# Altium PCB PCB Layout.PcbDoc
Units mm, origin at the board's own origin, x right, y up, seen from the top; angles counter-clockwise.
Board outline 49.28 x 47.88 mm, 2 copper layers (Top Layer, Bottom Layer); 42 components, 39 nets, 175 pads, 37 vias.
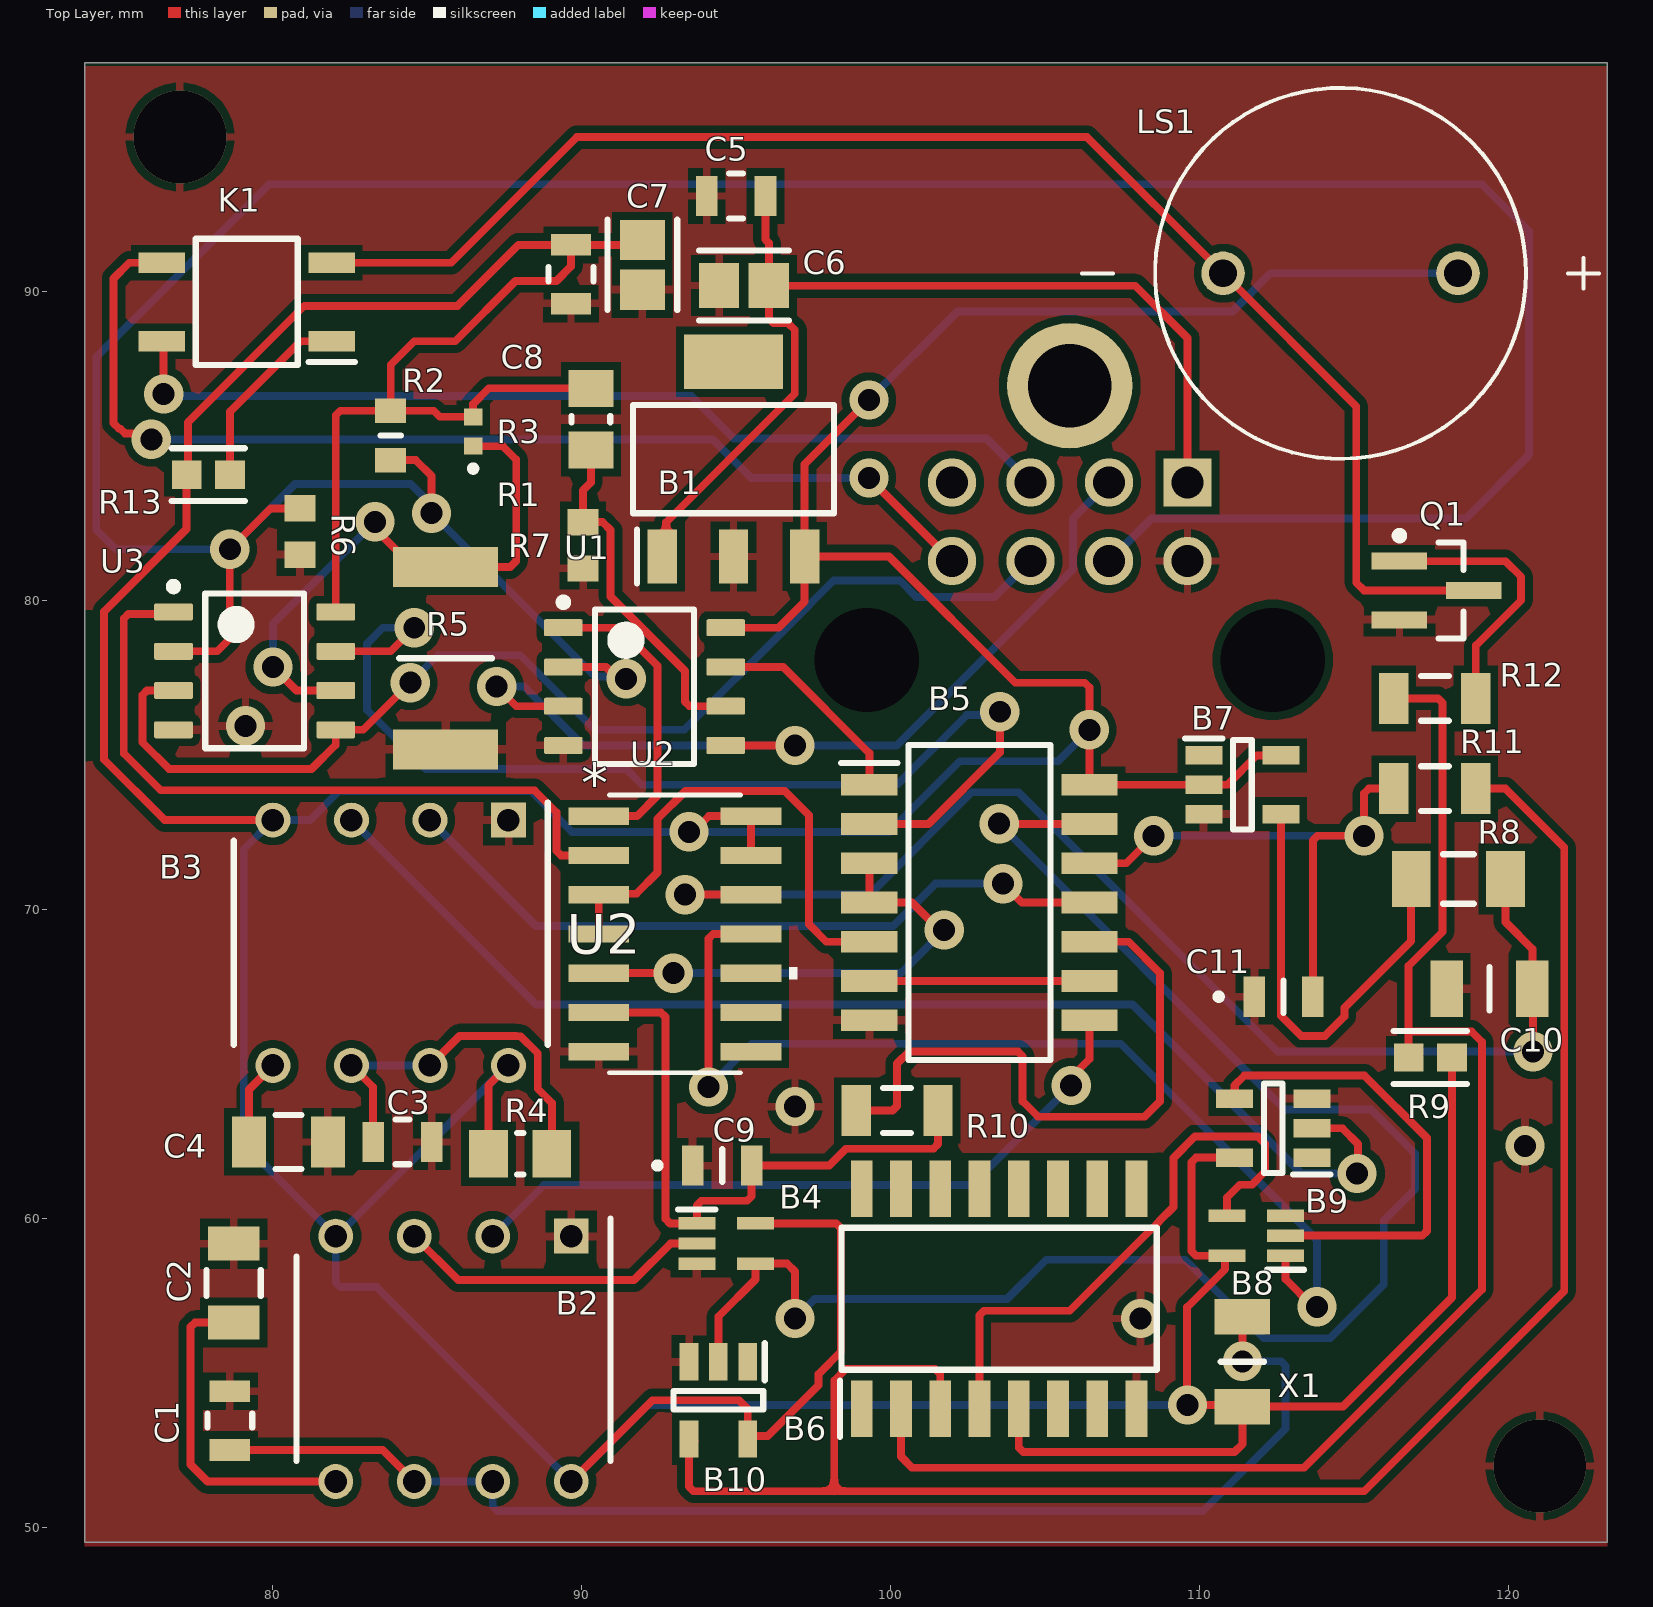
[diagram p0: Top Layer view]
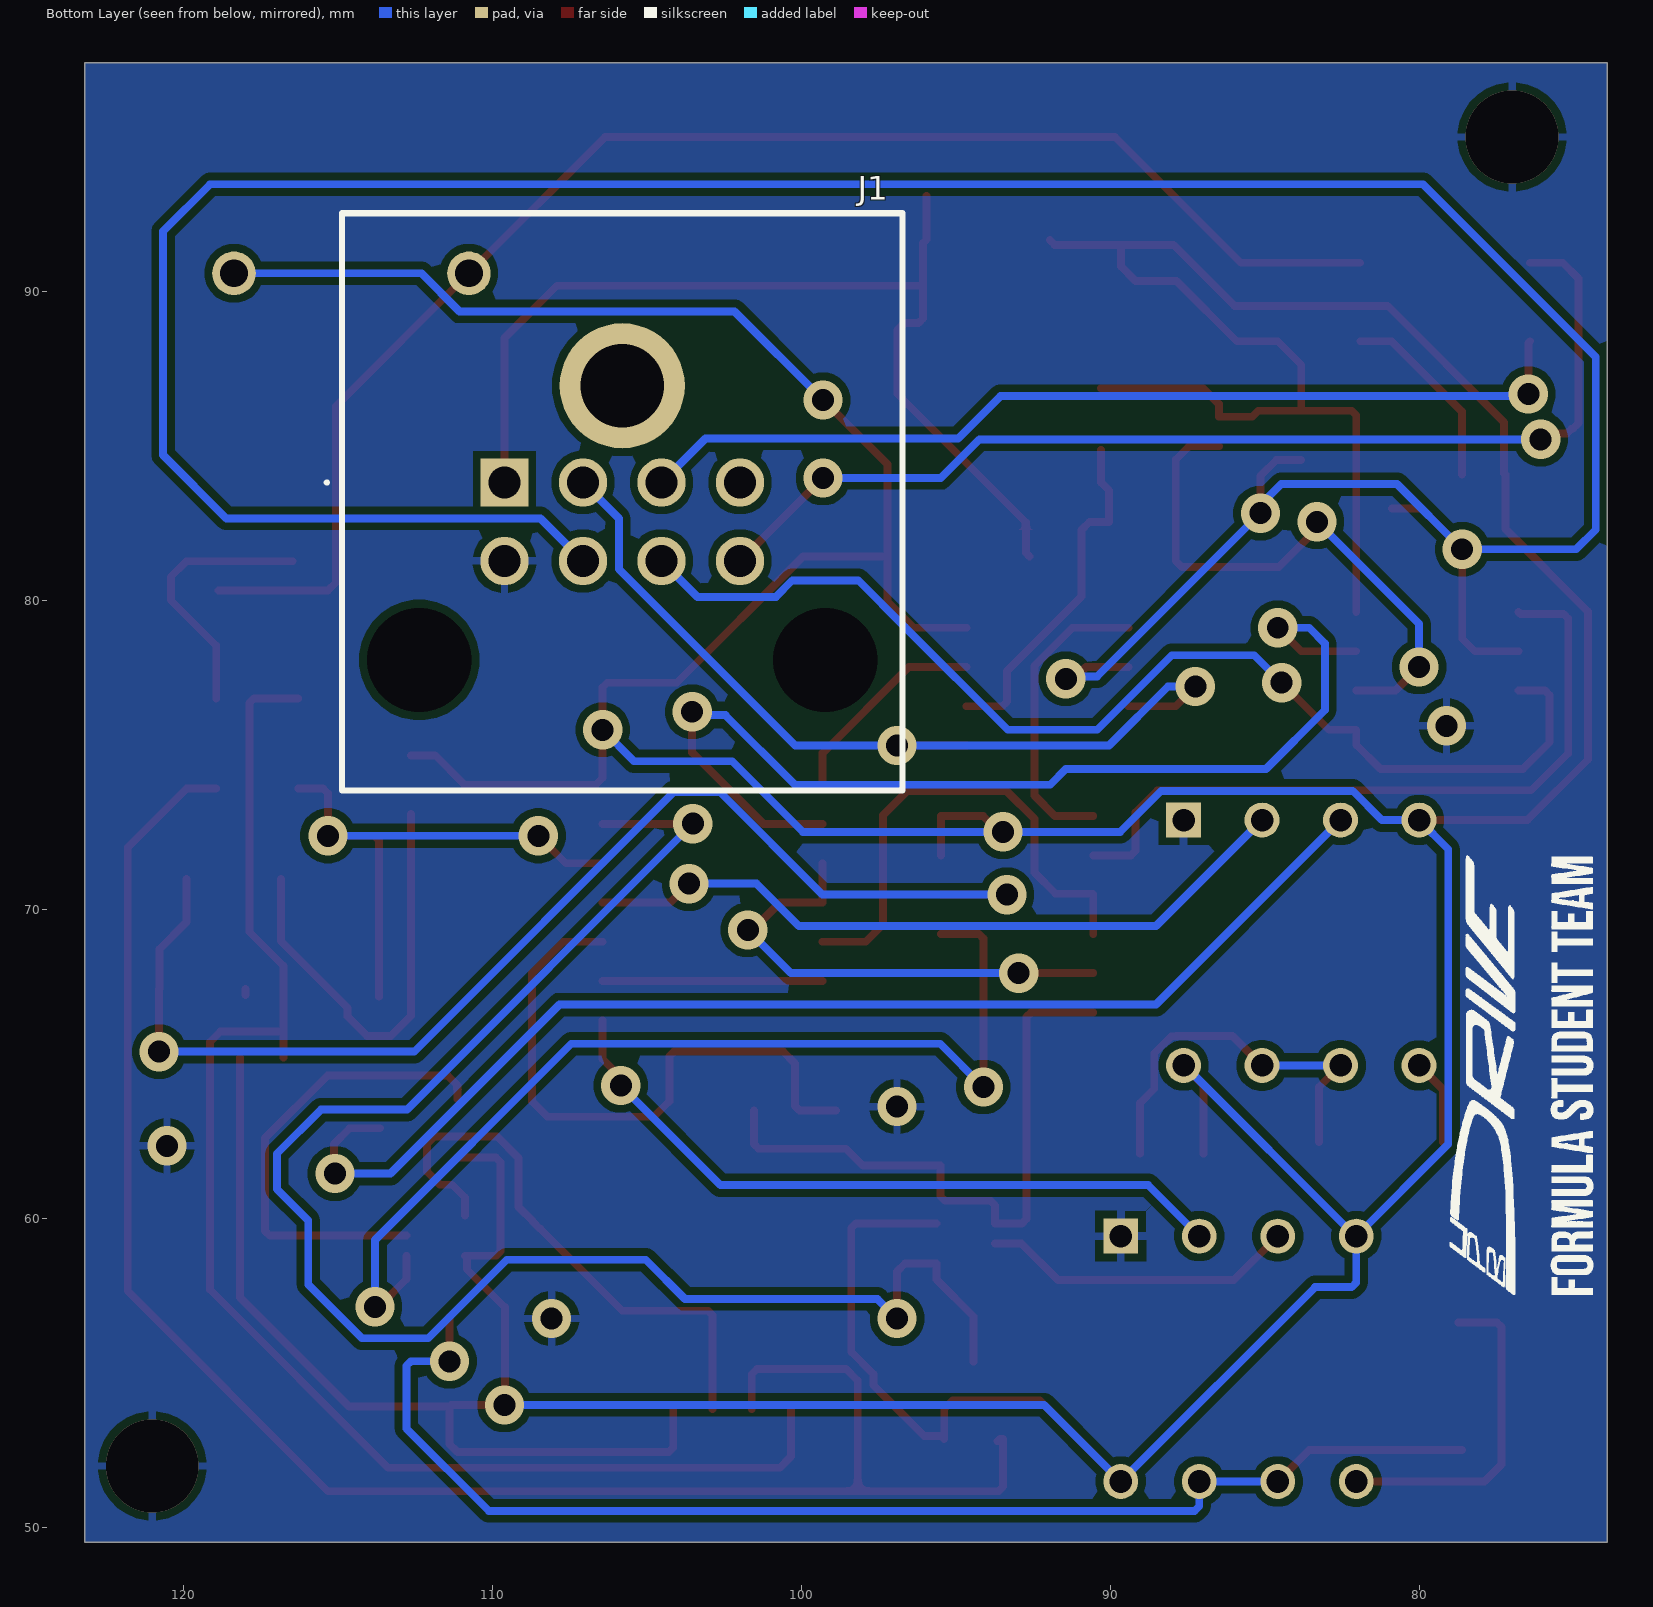
[diagram p1: Bottom Layer view, seen from below]

## Layer stack, top to bottom
Top Solder: solder mask 0.0102, Solder Resist, Dk 3.8
Top Layer: signal copper 0.0356
Dielectric 2: core 0.32, NP-155F, Dk 4.43
Bottom Layer: signal copper 0.0356
Bottom Solder: solder mask 0.0102, Solder Resist, Dk 3.8

## Board outline
73.914,49.53 73.914,97.409 123.19,97.409 123.19,49.53

## Design rules (kind name [scope] priority, off if disabled: settings)
Clearance [All] p1: gap=0.254 ignorepadtopadclearanceinfootprint=TRUE
PolygonConnect [All] p1: connectstyle=Relief reliefconductorwidth=0.254 reliefentries=4 polygonreliefangle="90 Angle" airgapwidth=0.254
RoutingVias [All] p1: holewidth=0.711 width=1.27 viastyle="Through Hole" minholewidth=0.711 minwidth=1.27 maxholewidth=0.711 maxwidth=1.27
SolderMaskExpansion [All] p1: expansion=0.102 istentingtop=FALSE
SupplyNets "Schematic Supply Nets" [InNet('GND')] p1: voltage=0.000
Width [All] p1: maxlimit=0.254 minlimit=0.254 preferedwidth=0.254
30 further rules are at their usual default settings.

## Components (designator, comment, footprint, x,y, rotation, side; value= is the part's Value field where it differs from the comment)
B1 "UA78M05QDCYRQ1" SOT230P700X180-4N 94.912,84.577 r90 top
B2 "NE555P" DIP794W53P254L959H508Q8N 85.852,55.466 r270 top
B3 "NE555P" DIP794W53P254L959H508Q8N 83.82,68.928 r270 top
B4 "500ms Timeout" SOT65P210X110-5N 94.676,59.197 r0 top
B5 "NAND Logic" SOIC127P780X200-14N 102.87,70.231 r0 top
B6 "CD4043BNSR" SOIC127P780X200-16N 103.505,57.41 r90 top
B7 "CAHCT1G14QDBVRQ1" SOT95P280X145-5N 111.379,74.041 r0 top
B8 "SN74LVC1G32DCKRE4" SOT65P210X110-5N 111.826,59.451 r180 top
B9 "CAHCT1G14QDBVRQ1" SOT95P280X145-5N 112.375,62.926 r180 top
B10 "CAHCT1G14QDBVRQ1" SOT95P280X145-5N 94.422,54.122 r270 top
C1 "GRM21BR61H106ME43K" FP-GRM21B-0_2-e0_2_0_7-MFG 78.613,53.467 r90 top value=10µF
C2 "CL31B104KBCNNNL" FP-CL31-IPC_C 78.74,57.918 r90 top value=100nF
C3 "GRM21BR61H106ME43K" FP-GRM21B-0_2-e0_2_0_7-MFG 84.201,62.484 r0 top value=10µF
C4 "CL31B104KBCNNNL" FP-CL31-IPC_C 80.512,62.484 r0 top value=100nF
C5 "GRM21BR61H106ME43K" FP-GRM21B-0_2-e0_2_0_7-MFG 94.996,93.091 r0 top value=10µF
C6 "08051C104K4Z2A" FP-0805-L_2_01_0_2-W_1_25-IPC_B 95.251,90.194 r0 top value=100nF
C7 "08051C104K4Z2A" FP-0805-L_2_01_0_2-W_1_25-IPC_B 91.961,90.863 r90 top value=100nF
C8 "GRM21BR61H106ME43K" FP-GRM21B-0_2-e0_2_0_7-MFG 89.654,90.56 r90 top value=10µF
C9 "GRM21BC81D106KE51K" GRM21BR60J226ME39L 94.549,61.722 r0 top value=10uF
C10 "CL31A107MQHNNWE" CAPC3216X180N 119.373,67.437 r0 top
C11 "GRM21BC81D106KE51K" GRM21BR60J226ME39L 112.71,67.183 r0 top value=10uF
J1 "30700-4081" 307004081 109.601,83.82 r180 bottom
K1 "CPC1017N" SOP254P610X206-4N 79.165,89.662 r180 top
LS1 "KXG1203C" XDCR_KXG1203C 114.554,90.589 r180 top
Q1 "BSR315P" INF-PG-SC59_M 117.659,80.325 r0 top
R1 "34K" MCS04020C1003FE000 86.487,85.471 r90 top
R2 "68k" RESC1608X55N#1 83.82,85.344 r90 top
R3 "RC0805FR-13200KL" RESC2013X60X35ML10T20 90.297,85.868 r90 top value=200kΩ
R4 "RK73H2ATTD1003F" RESC2013X60X30ML20T20 88.011,62.103 r0 top value=100kΩ
R5 "10k" RESC6332X70N 85.598,78.134 r90 top
R6 "4.3k" RESC1608X50N 80.883,82.235 r90 top
R7 "37k" RESC1608X55N#2 90.043,81.788 r90 top
R8 "RC1206FR-07100RL" RESC3116X65X40ML10T20 118.364,70.993 r0 top value=100R
R9 "RN73C1J10KB" FP-RN731J-IPC_B 117.458,65.215 r0 top value=10kΩ
R10 "CRCW12061K00FKEA" RESC3216X60X45LL15T20 100.203,63.5 r0 top value=1kR
R11 "CRCW12061K00FKEA" RESC3216X60X45LL15T20 117.602,73.914 r0 top value=1kR
R12 "CRCW12064K70FKEA" RESC3216X60X45LL15T20 117.602,76.835 r0 top value=4.7kR
R13 "RN73C1J10KB" FP-RN731J-IPC_B 77.918,84.074 r0 top value=10kΩ
U1 "LM392MX" D0008A_L 92.033,77.216 r0 top
U2 "AND Logic" D14 93.015,69.215 r0 top
U3 "LM392MX" D0008A_L 79.417,77.724 r0 top
X1 "45.3k" RESC3216X65N 111.379,55.372 r90 top

## Footprints (in the part's own frame and the unit in brackets; to place one, negate y for a bottom-side part, rotate by r counter-clockwise, add the part's x,y. Pads: shape width x height; smd on the part's side, far side on the other; paste and mask are expansions set on the pad)
307004081 [mm]
  rect 1.56x1.56 hole 1.04: 1(0,0)
  round 1.56 hole 1.04: 2(2.54,0) 3(5.08,0) 4(7.62,0) 5(0,-2.54) 6(2.54,-2.54) 7(5.08,-2.54) 8(7.62,-2.54)
  round 4.05 hole 2.7: MH1(3.81,3.13)
  round 1.685 hole 3.37 unplated: MH2(-2.76,-5.74) MH3(10.38,-5.74)
  silkscreen extent -5.8,-9.97 12.88,8.71
CAPC3216X180N [mm]
  rect 1.05x1.82 smd: 1(-1.39,0) 2(1.39,0)
  silkscreen extent 0,-0.7 0,0.7
D0008A_L [mm] "SOIC, 8-Leads, Body 5x4mm, Pitch 1.27mm, IPC High Density"
  rrect18% 1.25x0.55 smd: 1(-2.625,1.905) 2(-2.625,0.635) 3(-2.625,-0.635) 4(-2.625,-1.905) 5(2.625,-1.905) 6(2.625,-0.635) 7(2.625,0.635) 8(2.625,1.905)
  silkscreen extent -2.75,-2.5 1.6,2.85, body extent -3,-2.45 3,2.45, height 1.63
D14 [mm]
  rect 1.97x0.558 smd paste+0 mask+0: 1(-2.464,3.81) 2(-2.464,2.54) 3(-2.464,1.27) 4(-2.464,0) 5(-2.464,-1.27) 6(-2.464,-2.54) 7(-2.464,-3.81) 8(2.464,-3.81) 9(2.464,-2.54) 10(2.464,-1.27) 11(2.464,0) 12(2.464,1.27) 13(2.464,2.54) 14(2.464,3.81)
  silkscreen extent -2.12,-4.5 3.96,4.5, body extent -3.1,-4.37 3.1,4.37, height 1.76
DIP794W53P254L959H508Q8N [mm]
  rect 1.13x1.13 / inner round 1.13 / far side rect 1.13x1.13 hole 0.73: 1(-3.97,3.81)
  round 1.13 hole 0.73: 2(-3.97,1.27) 3(-3.97,-1.27) 4(-3.97,-3.81) 5(3.97,-3.81) 6(3.97,-1.27) 7(3.97,1.27) 8(3.97,3.81)
  silkscreen extent -4.53,-5.08 3.3,5.08
FP-0805-L_2_01_0_2-W_1_25-IPC_B [mm]
  rect 1.305x1.456 smd paste+0 mask+0: 1(-0.806,0) 2(0.806,0)
  silkscreen extent -1.46,-1.13 1.46,1.13, body extent -1.71,-0.98 1.71,0.98, height 0.25
FP-CL31-IPC_C [mm]
  rect 1.105x1.658 smd paste+0 mask+0: 1(-1.276,0) 2(1.276,0)
  silkscreen extent -0.42,-0.87 0.42,0.87, body extent -1.93,-0.97 1.93,0.97, height 0.25
FP-GRM21B-0_2-e0_2_0_7-MFG [mm]
  rect 0.7x1.3 smd paste+0 mask+0: 1(-0.95,0) 2(0.95,0)
  silkscreen extent -0.22,-0.73 0.22,0.73, body extent -1.4,-0.82 1.4,0.82, height 0.25
FP-RN731J-IPC_B [mm]
  rect 0.958x0.912 smd paste+0 mask+0: 1(-0.702,0) 2(0.702,0)
  silkscreen extent -1.18,-0.86 1.18,0.86, body extent -1.43,-0.71 1.43,0.71, height 0.25
GRM21BR60J226ME39L [mm]
  rect 0.7x1.3 smd: 1(-0.95,0) 2(0.95,0)
  silkscreen extent -2.2,-0.53 0,0.53
INF-PG-SC59_M [mm] "SOT23, 3-Leads, Body 3x1.53mm, Pitch 0.95mm, IPC Low Density"
  rect 1.8x0.55 smd: 1(-1.2,0.95) 2(-1.2,-0.95) 3(1.2,0)
  silkscreen extent -1.32,-1.55 0.87,1.9, body extent -0.87,-1.55 0.87,1.55, height 1.35
MCS04020C1003FE000 [mm]
  rect 0.55x0.6 smd: 1(-0.475,0) 2(0.475,0)
  silkscreen extent -1.3,-0.1 -1.1,0.1
RESC1608X50N [mm]
  rect 0.85x1 smd: 1(-0.75,0) 2(0.75,0)
RESC1608X55N#1 [mm]
  rect 0.8x1 smd: 1(-0.8,0) 2(0.8,0)
  silkscreen extent 0,-0.33 0,0.33
RESC1608X55N#2 [mm]
  rect 0.85x1 smd: 1(-0.75,0) 2(0.75,0)
RESC2013X60X30ML20T20 [mm] "Chip Resistor, 2-Leads, Body 2.00x1.25mm, IPC Low Density"
  rect 1.25x1.55 smd: 1(-1.025,0) 2(1.025,0)
  silkscreen extent -0.1,-0.67 0.1,0.67, body extent -1.1,-0.72 1.1,0.72, height 0.6
RESC2013X60X35ML10T20 [mm] "Chip Resistor, 2-Leads, Body 2.00x1.25mm, IPC Low Density"
  rect 1.2x1.45 smd: 1(-1,0) 2(1,0)
  silkscreen extent -0.1,-0.62 0.1,0.62, body extent -1.05,-0.67 1.05,0.67, height 0.6
RESC3116X65X40ML10T20 [mm] "Chip Resistor, 2-Leads, Body 3.10x1.60mm, IPC Low Density"
  rect 1.25x1.8 smd: 1(-1.525,0) 2(1.525,0)
  silkscreen extent -0.5,-0.8 0.5,0.8, body extent -1.6,-0.85 1.6,0.85, height 0.65
RESC3216X60X45LL15T20 [mm] "Chip Resistor, 2-Leads, Body 3.3x1.75mm, IPC High Density"
  rect 0.95x1.65 smd: 1(-1.325,0) 2(1.325,0)
  silkscreen extent -0.45,-0.73 0.45,0.73, body extent -1.65,-0.87 1.65,0.87, height 0.6
RESC3216X65N [mm]
  rect 1.15x1.8 smd: 1(-1.45,0) 2(1.45,0)
  silkscreen extent 0,-0.7 0,0.7
RESC6332X70N [mm]
  rect 1.3x3.4 smd: 1(-2.95,0) 2(2.95,0)
  silkscreen extent 0,-1.5 0,1.5
SOIC127P780X200-14N [mm]
  rect 1.825x0.7 smd: 1(-3.562,3.81) 2(-3.562,2.54) 3(-3.562,1.27) 4(-3.562,0) 5(-3.562,-1.27) 6(-3.562,-2.54) 7(-3.562,-3.81) 8(3.562,-3.81) 9(3.562,-2.54) 10(3.562,-1.27) 11(3.562,0) 12(3.562,1.27) 13(3.562,2.54) 14(3.562,3.81)
  silkscreen extent -4.48,-5.1 2.3,5.1
SOIC127P780X200-16N [mm]
  rect 1.825x0.7 smd: 1(-3.562,4.445) 2(-3.562,3.175) 3(-3.562,1.905) 4(-3.562,0.635) 5(-3.562,-0.635) 6(-3.562,-1.905) 7(-3.562,-3.175) 8(-3.562,-4.445) 9(3.562,-4.445) 10(3.562,-3.175) 11(3.562,-1.905) 12(3.562,-0.635) 13(3.562,0.635) 14(3.562,1.905) 15(3.562,3.175) 16(3.562,4.445)
  silkscreen extent -4.47,-5.1 2.3,5.15
SOP254P610X206-4N [mm]
  rect 1.5x0.65 smd: 1(-2.75,1.27) 2(-2.75,-1.27) 3(2.75,-1.27) 4(2.75,1.27)
  silkscreen extent -3.5,-2.04 1.65,2.04
SOT65P210X110-5N [mm]
  rect 1.2x0.4 smd: 1(-0.95,0.65) 2(-0.95,0) 3(-0.95,-0.65) 4(0.95,-0.65) 5(0.95,0.65)
  silkscreen extent -1.55,1.1 -0.35,1.1
SOT95P280X145-5N [mm]
  rect 1.2x0.6 smd: 1(-1.25,0.95) 2(-1.25,0) 3(-1.25,-0.95) 4(1.25,-0.95) 5(1.25,0.95)
  silkscreen extent -1.85,-1.45 0.3,1.5
SOT230P700X180-4N [mm]
  rect 1.75x0.95 smd: 1(-3.15,2.3) 2(-3.15,0) 3(-3.15,-2.3)
  rect 1.75x3.2 smd: 4(3.15,0)
  silkscreen extent -4.03,-3.25 1.75,3.25
XDCR_KXG1203C [mm]
  round 1.408 hole 0.9: P(-3.8,0) ""(3.8,0)
  silkscreen extent -8.36,-6 8.36,6

## Part data
B1: library part CMP-243-000000-1, "Standard Regulator Pos 5V 0.5A Automotive 4-Pin(3+Tab) SOT-223 T/R", Manufacturer_Name="Texas Instruments", Mouser Part Number=595-UA78M05QDCYRQ1, Datasheet Link=https://www.arrow.com/en/products/ua78m05qdcyrq1/texas-instruments, Design Item ID=UA78M05QDCYRQ1, Geometry.Height=1.8mm, Manufacturer_Part_Number=UA78M05QDCYRQ1, Mouser Price/Stock=https://www.mouser.co.uk/ProductDetail/Texas-Instruments/UA78M05QDCYRQ1?qs=LVErsypW30y8J3NDf5LIpA%3D%3D, Source=UA78M05QDCYRQ1.SchLib
B2 B3: library part CMP-167-000004-1, "Precision timer,NE555P 0.5MHz DIL8 Texas Instruments NE555P, Precision Timer, 4.5  16 V, 8-Pin PDIP", Manufacturer_Name="Texas Instruments", Mouser Part Number=595-NE555P, Datasheet Link=http://www.ti.com/lit/ds/symlink/ne555.pdf, Design Item ID=NE555P, Geometry.Height=5.08mm, Manufacturer_Part_Number=NE555P, Mouser Price/Stock=https://www.mouser.co.uk/ProductDetail/Texas-Instruments/NE555P?qs=rkhjVJ6%2F3EIf4CWgjIKuKQ%3D%3D, Source=NE555P.SchLib
B4: library part CMP-176-000003-1, "IC GATE XOR 1CH 2-INP SC70-5", Manufacturer_Name="Texas Instruments", Manufacturer_Part_Number=SN74AHC1G86DCKRE4, Mouser Part Number=595-SN74AHC1G86DCKE4, Datasheet Link=http://www.ti.com/general/docs/suppproductinfo.tsp?distId=10&gotoUrl=http%3A%2F%2Fwww.ti.com%2Flit%2Fgpn%2Fsn74ahc1g86, Design Item ID=SN74AHC1G86DCKRE4, Geometry.Height=1.1mm, Mouser Price/Stock=https://www.mouser.co.uk/ProductDetail/Texas-Instruments/SN74AHC1G86DCKRE4?qs=fSCvMSq5ISXiVG84KUEwUA%3D%3D, Source=SN74AHC1G86DCKRE4.SchLib
B5: library part CMP-216-000000-1, "Quadruple 2-Input Positive-NAND Gates", Manufacturer_Name="Texas Instruments", Manufacturer_Part_Number=SN74ACT00NSR, Mouser Part Number=595-SN74ACT00NSR, Datasheet Link=http://www.ti.com/lit/gpn/sn74act00, Design Item ID=SN74ACT00NSR, Geometry.Height=2mm, Mouser Price/Stock=https://www.mouser.co.uk/ProductDetail/Texas-Instruments/SN74ACT00NSR?qs=pdM4geFiyZQ6dUA3Pnq9Sg%3D%3D, Source=SN74ACT00NSR.SchLib
B6: library part CMP-180-000000-1, "CMOS Quad NOR R/S Latch with 3-State Outputs", Manufacturer_Name="Texas Instruments", Mouser Part Number=595-CD4043BNSR, Datasheet Link=http://www.ti.com/lit/gpn/cd4043b, Design Item ID=CD4043BNSR, Geometry.Height=2mm, Manufacturer_Part_Number=CD4043BNSR, Mouser Price/Stock=https://www.mouser.co.uk/ProductDetail/Texas-Instruments/CD4043BNSR?qs=dQbkqP7qjaak3gfhrS2sTg%3D%3D, Source=CD4043BNSR.SchLib
B7 B9 B10: library part CMP-183-000003-1, "Automotive single 4.5V-to-5.5V inverter with Schmitt-trigger inputs", Manufacturer_Name="Texas Instruments", Mouser Part Number=595-CAHCT1G14QDBVRQ1, Datasheet Link=https://www.ti.com/lit/ds/symlink/sn74ahct1g14-q1.pdf?ts=1750857968201&ref_url=https%253A%252F%252Fwww.mouser.it%252F, Design Item ID=CAHCT1G14QDBVRQ1, Geometry.Height=1.45mm, Manufacturer_Part_Number=CAHCT1G14QDBVRQ1, Mouser Price/Stock=https://www.mouser.co.uk/ProductDetail/Texas-Instruments/CAHCT1G14QDBVRQ1?qs=dbcCsuKDzFVQWtcvbPNdyw%3D%3D, Source=CAHCT1G14QDBVRQ1.SchLib
B8: library part CMP-180-000009-1, "OR Gate 1-Element 2-IN CMOS 5-Pin SC-70 T/R", Manufacturer_Name="Texas Instruments", Mouser Part Number=595-74LVC1G32DCKRE4, Datasheet Link=http://www.ti.com/general/docs/suppproductinfo.tsp?distId=10&gotoUrl=http%3A%2F%2Fwww.ti.com%2Flit%2Fgpn%2Fsn74lvc1g32, Design Item ID=SN74LVC1G32DCKRE4, Geometry.Height=1.1mm, Manufacturer_Part_Number=SN74LVC1G32DCKRE4, Mouser Price/Stock=https://www.mouser.co.uk/ProductDetail/Texas-Instruments/SN74LVC1G32DCKRE4?qs=nqigI8dpoHId5Bn%2Fo4o8zg%3D%3D, Source=SN74LVC1G32DCKRE4.SchLib
C1 C3 C5 C8: library part CMP-041-000022-1, "Multilayer Ceramic Capacitors MLCC - SMD/SMTSimulate & compare characteristics in SimSurfing", Case/Package=0805, Dielectric=X5R, Dielectric Material=Ceramic, Manufacturer Lifecycle Status="IN PRODUCTION", Max Operating Temperature=85°C, Min Operating Temperature=-55°C, Tolerance=20%, Voltage Rating=50V, Height=1.25mm, Length=2mm, Lifecycle Status=Production, Material=Ceramic, Mounting Technology="Surface Mount", Number of Terminals=2, REACH SVHC=Yes, RoHS=Compliant, Thickness=1.25mm, Voltage Rating (DC)=50V, Width=1.25mm
C2 C4: library part CMP-041-000000-1, "Ceramic Capacitor, Multilayer, Ceramic, 50V, 10% +Tol, 10% -Tol, X7R, 15% TC, 0.1uF, Surface Mount, 1206"
C6 C7: library part CMP-041-000019-1, "Ceramic Capacitor, Multilayer, Ceramic, 100V, 10% +Tol, 10% -Tol, X7R, 15% TC, 0.1uF, Surface Mount, 0805", Capacitor Type=Ceramic, Case/Package=0805, Max Operating Temperature=125°C, Min Operating Temperature=-55°C, Package Shape=Rectangular, Package Style=SMTMeter, Rated DC Voltage (URdc)=100V, Temperature Characteristics Code=X7R, Tolerance  (fill in as +-)=10%, Dielectric Material=Ceramic, Height=1.27mm, JESD-609 Code=e3, Length=2.01mm, Mounting Technology="Surface Mount", Multilayer=Yes, Packaging="Tape and Reel", Pins=2, Reach SVHC Compliant=Yes, Reference Standard=AEC-Q200, RoHS Compliant=Yes, Terminal Finish=Nickel, Termination=Wraparound, Tolerance (fill in as +-)=10%, Width=1.25mm
C9 C11: library part CMP-041-000023-1, "Multilayer Ceramic Capacitors MLCC - SMD/SMT 0805 10uF 20volts *Derate Voltage/Temp", Manufacturer_Name="Murata Electronics", Mouser Part Number=81-GRM21BC81D106KE1K, Datasheet Link=https://search.murata.co.jp/Ceramy/image/img/A01X/G101/ENG/GRM21BC81D106KE51-01A.pdf, Design Item ID=GRM21BC81D106KE51K, Geometry.Height=1.45mm, Manufacturer_Part_Number=GRM21BC81D106KE51K, Mouser Price/Stock=https://www.mouser.co.uk/ProductDetail/Murata-Electronics/GRM21BC81D106KE51K?qs=QzBtWTOodeX3BXZzorRwZw%3D%3D, Source=GRM21BC81D106KE51K.SchLib
C10: library part CMP-041-000025-1, Manufacturer_Name=SAMSUNG, Mouser Part Number=187-CL31A107MQHNNWE, Datasheet Link=https://www.arrow.com/en/products/cl31a107mqhnnwe/samsung-electro-mechanics, Design Item ID=CL31A107MQHNNWE, Geometry.Height=1.8mm, Manufacturer_Part_Number=CL31A107MQHNNWE, Mouser Price/Stock=https://www.mouser.co.uk/ProductDetail/Samsung-Electro-Mechanics/CL31A107MQHNNWE?qs=xZ%2FP%252Ba9zWqZ1plV7MDkjgw%3D%3D, Source=CL31A107MQHNNWE.SchLib
J1: library part CMP-281-000000-1, "Automotive Connectors HDAC64 DR VERT HDR 8 DR 8 CKT BLACK POL 2", Manufacturer_Name=Molex, Mouser Part Number=538-30700-4081, Datasheet Link=https://componentsearchengine.com/Datasheets/1/30700-4081.pdf, Design Item ID=30700-4081, Geometry.Height=21.83mm, Manufacturer_Part_Number=30700-4081, Mouser Price/Stock=https://www.mouser.co.uk/ProductDetail/Molex/30700-4081?qs=ZlMU7IUseCstceQEx6TmTA%3D%3D, Source=30700-4081.SchLib
K1: library part CMP-126-000001-1, "Relay SSR 50mA 1.4V DC-IN 0.1A 60V 4-Pin SOP Tube", Manufacturer_Name=LITTELFUSE, Mouser Part Number=849-CPC1017N, Datasheet Link=https://www.ixysic.com/home/pdfs.nsf/www/CPC1017N.pdf/$file/CPC1017N.pdf, Design Item ID=CPC1017N, Geometry.Height=2.055mm, Manufacturer_Part_Number=CPC1017N, Mouser Price/Stock=https://www.mouser.co.uk/ProductDetail/IXYS-Integrated-Circuits/CPC1017N?qs=h2iAtNzNjMSJoWxc%2FDvCWA%3D%3D, Source=CPC1017N.SchLib
LS1: library part CMP-279-000000-1, Package=None, Availability=Unavailable, Component Type=Standard, Design Item ID=KXG1203C, MP=KXG1203C, Pin Count=2, Price=None, Source=KXG1203C.SchLib
Q1: library part CMP-00007-1, "Small Signal Field-Effect Transistor, 0.62A I(D), 60V, 1-Element, P-Channel, Silicon, Metal-oxide Semiconductor FET", Drain Current-Max (ID)=620mA, Drain-source On Resistance-Max=800mR, DS Breakdown Voltage-Min=60V, Operating Mode="ENHANCEMENT MODE", Package Body Material=Plastic, Package Shape=Rectangular, Package Style="SMALL OUTLINEMeter", Feedback Cap-Max (Crss)=30pF, FET Technology="METAL-OXIDE SEMICONDUCTOR", JESD-30 Code=R-PDSO-G3, Moisture Sensitivity Level=1, Number of Elements=1, Pins=3, Polarity/Channel Type=P-CHANNEL, Reach SVHC Compliant=Yes, Reference Standard=AEC-Q101, RoHS Compliant=Yes, Surface Mount=Yes, Terminal Form="Gull Wing", Terminal Position=DUAL, Transistor Element Material=SILICON
R1: library part CMP-150-000008-1, "Vishay Resistor Chip 0402", Manufacturer_Name=Vishay, Manufacturer_Part_Number=MCS04020D3402BE000, Datasheet Link=http://www.vishay.com/docs/28705/mcx0x0xpro.pdf, Design Item ID=MCS04020D3402BE000, Geometry.Height=0.37mm, Source=MCS04020D3402BE000.SchLib
R2: library part CMP-191-000001-1, "Thin Film Resistors - SMD MCT 0603-15 0.1% AT P5 68K", Manufacturer_Name=Vishay, Manufacturer_Part_Number=MCT0603ME6802BP500, Mouser Part Number=594-MCT0603ME6802BP5, Datasheet Link=http://www.vishay.com/docs/28705/mcx0x0xpro.pdf, Design Item ID=MCT0603ME6802BP500, Geometry.Height=0.55mm, Mouser Price/Stock=https://www.mouser.co.uk/ProductDetail/Vishay/MCT0603ME6802BP500?qs=Wj%2FVkw3K%252BMDGy1OX8yGPTg%3D%3D, Source=MCT0603ME6802BP500.SchLib
R3: library part CMP-00087-1, "Res Thick Film 0805 200K Ohm 1% 0.125W(1/8W) ±100ppm/C Molded SMD T/R", Case Code (Imperial)=0805, Case Code (Metric)=2012, Max Operating Temperature=155°C, Min Operating Temperature=-55°C, Power Dissipation=125mW, Temperature Coefficient=100ppm/°C, Tolerance=1%, Voltage Rating=150V, Case/Package=0805, China RoHS=Non-Compliant, Composition="Thick Film", Contact Plating=Tin, Height=500µm, Lead Free="Lead Free", Length=2mm, Lifecycle Status=Production, Mounting Technology="Surface Mount", Number of Terminals=2, Packaging="Tape & Reel", Power Rating=125mW, Radiation Hardening=No, REACH SVHC=Yes, RoHS=Compliant, Schedule B="8533210045, 8533210045", Termination=SMD/SMT, Width=1.25mm, Working Voltage=150V
R4: library part CMP-00089-1, "Resistor Thick Film 0805 100K Ohm 1% 1/8W ±100ppm/°C SMD Punched Paper Tape and Reel", Case Code (Imperial)=0805, Case Code (Metric)=2012, Max Operating Temperature=155°C, Min Operating Temperature=-55°C, Power Dissipation=250mW, Power Rating=125mW, Temperature Coefficient=100ppm/°C, Tolerance=1%, Voltage Rating=150V, Case/Package=0805, China RoHS=Non-Compliant, Composition="Thick Film", Depth=1.25mm, Height=500µm, Lead Free="Lead Free", Length=2mm, Lifecycle Status=Production, Military Standard=Not, Mounting Technology="Surface Mount", Number of Terminals=2, Pins=2, REACH SVHC=Yes, RoHS=Compliant, Schedule B="8533210045, 8533210045", Termination=SMD/SMT, Voltage Rating (DC)=150V, Width=1.25mm, Working Voltage=150V
R5: library part CMP-150-000009-1, "10 +/-5% 1W Chip Resistor 2512 (6432 Metric) Automotive AEC-Q200 Thick Film", Manufacturer_Name=Bourns, Manufacturer_Part_Number=CR2512AJW-103ELF, Mouser Part Number=652-CR2512AJW-103ELF, Datasheet Link=https://www.bourns.com/docs/product-datasheets/crxxxxa.pdf, Design Item ID=CR2512AJW-103ELF, Geometry.Height=0.7mm, Mouser Price/Stock=https://www.mouser.co.uk/ProductDetail/Bourns/CR2512AJW-103ELF?qs=GedFDFLaBXEqggePGBQmuQ%3D%3D, Source=CR2512AJW-103ELF.SchLib
R6: library part CMP-194-000000-1, "Thick Film Resistors - SMD 1/10watt 4.3Kohms 1%", Manufacturer_Name=Vishay, Manufacturer_Part_Number=CRCW06034K30FKTA, Mouser Part Number=71-CRCW0603-4.3K, Datasheet Link=http://www.vishay.com/docs/20035/dcrcwe3.pdf, Design Item ID=CRCW06034K30FKTA, Geometry.Height=0.5mm, Mouser Price/Stock=https://www.mouser.co.uk/ProductDetail/Vishay-Dale/CRCW06034K30FKTA?qs=QIF1izkZhqViEzAn5govYA%3D%3D, Source=CRCW06034K30FKTA.SchLib
R7: library part CMP-222-000000-1, "Lead (Pb)-Bearing High Stability Thin Film Chip Resistors", Manufacturer_Name=Vishay, Manufacturer_Part_Number=TNPW060337K0BEEA, Mouser Part Number=71-TNPW060337K0BEEA, Datasheet Link=https://www.vishay.com/docs/28758/tnpw_e3.pdf, Design Item ID=TNPW060337K0BEEA, Geometry.Height=0.55mm, Mouser Price/Stock=https://www.mouser.co.uk/ProductDetail/Vishay-Dale/TNPW060337K0BEEA?qs=ys0FHdAnsy4FXZekmjUp%2FA%3D%3D, Source=TNPW060337K0BEEA.SchLib
R8: library part CMP-00048-1, "Fixed Resistor, Metal Glaze/thick Film, 0.25W, 100ohm, 200V, 1% +/-Tol, 100ppm/Cel, Surface Mount, 1206", Case/Package=1206, Max Operating Temperature=155°C, Min Operating Temperature=-55°C, Package Height=0.55mm, Package Length=3.1mm, Package Shape=Rectangular, Package Width=1.6mm, Power=250mW, Rated Temperature=70°C, Resistor Type="FIXED RESISTOR", Temperature Coefficient (ppm/Cel)=100, Tolerance=1%, Working Voltage=200V, Additional Feature="LASER TRIMMABLE", Construction=Chip, JESD-609 Code=e3, Mounting Technology="Surface Mount", Packaging="Tape and Reel", Pins=2, Reach SVHC Compliant=Yes, RoHS Compliant=Yes, Technology="METAL GLAZE/THICK FILM", Terminal Finish=Nickel, Termination=Wraparound
R9 R13: library part CMP-00083-1, "RN 0603 SMD precision chip resistor 10K", Case/Package=0603, Max Operating Temperature=155°C, Min Operating Temperature=-55°C, Power Rating=63mW, Temperature Coefficient=10ppm/°C, Tolerance=0.1%, Voltage Rating=50V, Composition="Thin Film", Depth=800µm, Height=550µm, Length=1.6mm, RoHS=Compliant
R10 R11: library part CRCW12061K00FKEA-1, "Fixed Resistor, Metal Glaze/thick Film, 0.25W, 1000ohm, 200V, 1% +/-Tol, 100ppm/Cel, Surface Mount, 1206", Case/Package=1206, Max Operating Temperature=155°C, Min Operating Temperature=-55°C, Package Height=0.55mm, Package Length=3.2mm, Package Shape=Rectangular, Package Style=SMTMeter, Package Width=1.6mm, Power=250mW, Rated Temperature=70°C, Resistor Type="FIXED RESISTOR", Temperature Coefficient=100ppm/°C, Tolerance=1%, Working Voltage=200V, Additional Feature="RATED AC VOLTAGE (V): 200", Construction=Chip, JESD-609 Code=e3, Mounting Technology="Surface Mount", Packaging="Tape and Reel", Pins=2, Reach SVHC Compliant=Yes, Reference Standard=AEC-Q200, RoHS Compliant=Yes, Technology="METAL GLAZE/THICK FILM", Terminal Finish=Nickel, Termination=Wraparound
R12: library part CRCW12064K70FKEA-1, "Fixed Resistor, Metal Glaze/thick Film, 0.25W, 4700ohm, 200V, 1% +/-Tol, 100ppm/Cel, Surface Mount, 1206", Case/Package=1206, Max Operating Temperature=155°C, Min Operating Temperature=-55°C, Package Height=0.55mm, Package Length=3.2mm, Package Shape=Rectangular, Package Style=SMTMeter, Package Width=1.6mm, Power=250mW, Rated Temperature=70°C, Resistor Type="FIXED RESISTOR", Temperature Coefficient=100ppm/°C, Tolerance=1%, Working Voltage=200V, Additional Feature="RATED AC VOLTAGE (V): 200", Construction=Chip, JESD-609 Code=e3, Mounting Technology="Surface Mount", Packaging="Tape and Reel", Pins=2, Reach SVHC Compliant=Yes, Reference Standard=AEC-Q200, RoHS Compliant=Yes, Technology="METAL GLAZE/THICK FILM", Terminal Finish=Nickel, Termination=Wraparound
U1 U3: library part CMP-00081-1, "lm392-N Low Power Operational Amplifier/Voltage Comparator", Case/Package=SOIC, Input Bias Current=250nA, Input Offset Voltage (Vos)=5mV, Max Operating Temperature=70°C, Min Dual Supply Voltage=1.5V, Min Operating Temperature=0°C, Nominal Supply Current=600µA, Operating Supply Voltage=16V, Output Current=16mA, Common Mode Rejection Ratio=65dB, Gain Bandwidth Product=1MHz, Lead Free="Contains Lead", Mounting Technology="Surface Mount", Number of Channels=2, Pins=8, Radiation Hardening=No, RoHS=Non-Compliant
U2: library part CMP-213-000000-1, "4-ch, 2-input, 2-V to 6-V 5.2 mA drive strength AND gate 14-SOIC -55 to 125", Manufacturer_Name="Texas Instruments", Manufacturer_Part_Number=CD74HC08M, Copyright="Copyright (C) 2025 Ultra Librarian. All rights reserved.", Datasheet=https://www.ti.com/lit/gpn/cd74hc08, Design Item ID=CD74HC08M, RefDes=RefDes, Source=CD74HC08M.SchLib, Type=Type
X1: library part CMP-207-000000-1, "Thick Film Resistors - SMD 1206 45.3Kohm 1% High VoltageAEC-Q200", Manufacturer_Name="ROHM Semiconductor", Manufacturer_Part_Number=KTR18EZPF4532, Mouser Part Number=755-KTR18EZPF4532, Datasheet Link=http://rohmfs.rohm.com/en/products/databook/datasheet/passive/resistor/chip_resistor/ktr.pdf, Design Item ID=KTR18EZPF4532, Geometry.Height=0.65mm, Mouser Price/Stock=https://www.mouser.co.uk/ProductDetail/ROHM-Semiconductor/KTR18EZPF4532?qs=493kPxzlxfIcD4BSA1SqXw%3D%3D, Source=KTR18EZPF4532.SchLib

## Via types
v1: diameter 1.27, hole 0.711, Top Layer to Bottom Layer, 35 vias
v2: diameter 3, hole 3, Top Layer to Bottom Layer, 2 vias

## Nets (pads, with @x,y where several pads share a name; then routed paths per layer and width w, separated by ;. In a path a pad name is that pad's centre, name@x,y a point inside that pad or via, vN(x,y) a via of type N, cw(c..) or ccw(c..) an arc to the next point about the centre after c; other vN are vias at no path point)
10sOut: B3.3 B9.2 | length 40
  Top Layer w0.254: B9.2 114.612,62.926 115.122,62.417 115.122,61.495 v1(115.088,61.462)
  Bottom Layer w0.254: B3.3 88.519,66.929 107.823,66.929 113.29,61.462 v1(115.088,61.462)
500mOut: B2.3 B4.2 | length 10.2
  Top Layer w0.254: B2.3 86.004,58.014 91.694,58.014 92.877,59.197 B4.2
500mTrigger: B2.2 B5.8 | length 23.1
  Top Layer w0.254: v1(105.84,64.312) 105.84,64.577 106.426,65.163 106.426,66.415 B5.8
  Bottom Layer w0.254: B2.2 88.773,61.087 102.614,61.087 v1(105.84,64.312)
+12V: B1.1 C5.2 C6.2 J1.1 | length 33
  Top Layer w0.254: B1.1 92.733,81.548 92.733,82.534 96.893,86.694 96.893,88.759 96.67,88.983 96.206,88.983 96.057,89.131 96.057,90.185 107.909,90.185 109.601,88.494 J1.1 ; C5.2 95.946,91.678 96.057,91.567 C6.2
AndOut1: B5.5 U2.3 U2.4 | length 16.5
  Top Layer w0.254: U2.4 U2.3 90.578,70.512 91.768,70.512 92.456,71.2 92.456,72.938 93.356,73.838 96.571,73.838 97.353,73.056 97.353,69.525 97.917,68.961 B5.5
AutoRTrigger: B3.2 B5.11 | length 23.6
  Top Layer w0.254: v1(103.632,70.841) 104.242,70.231 B5.11
  Bottom Layer w0.254: B3.2 88.519,69.469 100.078,69.469 101.45,70.841 v1(103.632,70.841)
BPS: J1.7 U3.3 U3.5 | length 37.2
  Top Layer w0.254: U3.3 75.935,77.089 75.786,76.94 75.786,75.415 76.652,74.549 81.258,74.549 82.042,75.333 U3.5 82.931,75.819 v1(84.455,77.343)
  Bottom Layer w0.254: v1(84.455,77.343) 85.344,78.232 88.011,78.232 90.424,75.819 93.32,75.819 96.647,79.146 98.155,80.654 100.287,80.654 100.822,80.119 103.36,80.119 J1.7
BpsCheck: R1.1 R5.2 U3.6 | length 18.7
  Top Layer w0.254: v1(80.01,77.851) 80.772,77.089 U3.6 ; v1(83.312,82.55) 83.312,82.32 84.548,81.084 87.688,81.084 87.884,81.28 87.884,84.56 87.448,84.996 R1.1
  Bottom Layer w0.254: v1(80.01,77.851) 80.01,79.248 v1(83.312,82.55)
BSPDNOut: B5.6 B5.9 | length 7.1
  Top Layer w0.254: B5.6 B5.9
BSPDNOut500: B6.3 B10.4 R11.2 | length 59.2
  Top Layer w0.254: B10.4@93.645,52.801 93.574,52.872 B10.4 93.472,51.33 93.621,51.181 98.171,51.181 ; B6.3 101.6,54.969 101.428,55.142 98.552,55.142 98.171,54.76 98.171,51.181 ; R11.2 119.888,73.914 121.793,72.009 121.793,57.658 115.316,51.181 98.171,51.181
BSPDOut: B4.1 C9.2 R10.2 U2.6 | length 20.7
  Top Layer w0.254: U2.6 92.561,66.675 92.71,66.526 92.71,59.996 92.859,59.847 B4.1 93.726,60.43 93.875,60.579 95.35,60.579 95.499,60.728 C9.2 98.009,61.722 98.552,62.265 99.598,62.265 ; 99.598,62.265 101.379,62.265 101.528,62.414 R10.2
BSPDOut500: B4.4 B5.13 B10.2 | length 53.7
  Top Layer w0.254: B10.2 94.422,56.83 95.626,58.034 B4.4 96.647,58.547 96.901,58.293 v1(96.901,56.769) ; v1(103.507,72.78) 103.512,72.776 106.427,72.776 B5.13
  Bottom Layer w0.254: v1(96.901,56.769) 97.536,57.404 103.759,57.404 105.029,58.674 109.528,58.674 112.068,56.134 114.213,56.134 115.951,57.872 115.951,59.944 116.967,60.96 116.967,62.103 115.541,63.529 112.759,63.529 v1(103.507,72.78)
FINAL: B6.2 R9.1 R12.1 | length 47
  Top Layer w0.254: B6.2 100.33,52.304 100.691,51.943 113.37,51.943 119.126,57.699 119.126,65.723 118.797,66.052 116.756,66.052 ; R12.1 117.707,76.835 117.856,76.686 117.856,69.284 116.756,68.184 116.756,66.052 ; R9.1 116.756,66.052
GND: B1.2 B2.1 B3.1 B4.3 B5.7 B6.8 B7.3 B8.3 B9.3 B10.3 C1.2 C2.2 C3.2 C4.2 C5.1 C6.1 C7.1 C8.1 C9.1 C10.1 C11.1 J1.5 Q1.2 R5.1 R6.1 R7.1 U1.4 U2.7 U3.4 | length 0.2
  Top Layer w0.254: C10.1@117.983,67.234 C10.1
  other v1: 108.077,56.769 120.523,62.357 96.901,63.627 79.121,75.946
  other v2: 121,52 77,95
MinCheck: J1.6 R2.1 R6.2 U1.2 U3.2 | length 110.8
  Top Layer w0.254: U3.2 78.207,78.359 78.613,78.765 v1(78.613,81.661) 79.937,82.985 R6.2 ; R2.1 84.63,84.544 85.144,84.03 v1(85.144,82.829) ; U1.2 90.784,77.851 91.165,77.47 v1(91.44,77.47)
  Bottom Layer w0.254: v1(91.44,77.47) 91.361,77.549 90.424,77.549 v1(85.144,82.829) 85.144,83.093 84.467,83.769 80.721,83.769 v1(78.613,81.661) 74.93,81.661 74.295,82.296 74.295,87.884 79.883,93.472 119.126,93.472 120.65,91.948 120.65,84.709 118.6,82.659 108.44,82.659 J1.6
NAndOut1: B5.3 B5.4 U2.5 | length 15.8
  Top Layer w0.254: U2.5 v1(92.964,67.945) ; B5.3 B5.4 100.69,70.231 101.579,69.342 v1(101.727,69.342)
  Bottom Layer w0.254: v1(92.964,67.945) 100.33,67.945 v1(101.727,69.342)
NetB2_5: B2.5 C2.1 | length 10.8
  Top Layer w0.254: C2.1 77.492,56.642 77.343,56.493 77.343,52.045 77.892,51.496 B2.5
NetB2_6: B2.6 B2.7 C1.1 X1.2 | length 41.5
  Top Layer w0.254: C1.1 83.561,52.517 B2.6 ; v1(111.379,55.386) X1.2
  Bottom Layer w0.254: B2.6 B2.7 87.122,50.695 87.271,50.546 110.109,50.546 112.776,53.213 112.776,55.237 112.627,55.386 v1(111.379,55.386)
NetB3_5: B3.5 C4.1 | length 2.8
  Top Layer w0.254: C4.1 79.235,64.183 B3.5
NetB3_6: B3.6 B3.7 C3.1 R4.2 | length 12.9
  Top Layer w0.254: B3.6 83.251,64.257 C3.1 ; B3.7 86.045,65.913 87.884,65.913 87.893,65.904 88.022,65.904 88.576,65.35 88.576,64.205 89.036,63.745 R4.2
  Bottom Layer w0.254: B3.6 B3.7
NetB5_1: B5.1 U1.7 | length 6.8
  Top Layer w0.254: U1.7 96.52,77.851 99.308,75.063 B5.1
NetB5_2: B5.2 U3.7 | length 35.7
  Top Layer w0.254: U3.7 83.82,78.359 v1(84.582,79.121) ; B5.2 101.219,72.771 103.53,75.082 v1(103.53,76.403)
  Bottom Layer w0.254: v1(84.582,79.121) 83.566,79.121 83.058,78.613 83.058,76.454 84.963,74.549 91.44,74.549 91.948,74.041 100.203,74.041 102.456,76.294 103.422,76.294 v1(103.53,76.403)
NetB5_10: B5.10 R10.1 | length 20.2
  Top Layer w0.254: R10.1 100.054,63.5 100.203,63.649 100.203,65.024 100.584,65.405 104.118,65.405 104.267,65.256 104.267,63.798 104.768,63.296 108.211,63.296 108.712,63.798 108.712,67.945 107.696,68.961 B5.10
NetB5_12: B5.12 C11.2 R11.1 | length 18.4
  Top Layer w0.254: B5.12 107.62,71.501 v1(108.509,72.39) ; C11.2 113.66,72.241 113.809,72.39 v1(115.316,72.39) 115.316,73.765 115.465,73.914 R11.1
  Bottom Layer w0.254: v1(108.509,72.39) v1(115.316,72.39)
NetB6_4: B6.4 B8.4 | length 18.8
  Top Layer w0.254: B6.4 102.87,56.874 103.019,57.023 105.791,57.023 108.446,59.678 108.458,59.678 108.681,59.902 108.681,59.913 109.149,60.381 109.149,61.966 109.839,62.657 111.883,62.657 112.106,62.434 112.106,61.518 111.688,61.1 111.294,61.1 110.876,60.682 B8.4
NetB7_4: B7.4 R8.1 | length 14.4
  Top Layer w0.254: B7.4 112.629,66.568 113.284,65.913 114.046,65.913 114.681,66.548 114.681,66.827 116.839,68.985 R8.1
NetB8_2: B8.2 B9.4 | length 15.3
  Top Layer w0.254: B9.4 111.125,64.315 111.438,64.628 115.331,64.628 117.348,62.611 117.348,59.6 117.199,59.451 B8.2
NetC10_2: C10.2 R8.2 U2.12 | length 40.4
  Top Layer w0.254: v1(93.345,70.485) U2.12 ; R8.2 119.889,69.597 120.763,68.723 C10.2 120.777,67.423 v1(120.777,65.405)
  Bottom Layer w0.254: v1(93.345,70.485) 99.314,70.485 102.625,73.796 104.131,73.796 112.522,65.405 v1(120.777,65.405)
NetK1_1: K1.1 R13.2 | length 6.3
  Top Layer w0.254: R13.2 78.62,86.113 80.899,88.392 K1.1
NetK1_2: K1.2 LS1. Q1.3 | length 48
  Top Layer w0.254: K1.2 85.776,90.932 89.84,94.996 106.347,94.996 LS1. 115.062,86.281 115.062,80.579 115.316,80.325 Q1.3
NetQ1_1: Q1.1 R12.2 | length 8.7
  Top Layer w0.254: Q1.1 119.888,81.275 120.396,80.767 120.396,80.01 118.927,78.541 R12.2
NetU1_1: U1.1 U2.1 | length 9.9
  Top Layer w0.254: U1.1 91.226,79.121 92.456,77.891 92.456,73.692 91.789,73.025 U2.1
NetU2_2: U2.2 U3.1 | length 23.5
  Top Layer w0.254: U3.1 76.727,79.564 75.333,79.564 75.184,79.415 75.184,75.057 76.378,73.863 88.468,73.863 89.179,73.152 89.179,71.904 89.328,71.755 U2.2
SC-IN: J1.3 K1.4 | length 31
  Top Layer w0.254: K1.4 76.474,88.333 v1(76.474,86.687)
  Bottom Layer w0.254: v1(76.474,86.687) 76.547,86.614 93.555,86.614 94.925,85.245 103.096,85.245 J1.3
SC-OUT: J1.8 K1.3 | length 35.4
  Top Layer w0.254: v1(76.073,85.217) 75.879,85.411 75.223,85.411 75.072,85.562 75.033,85.562 74.854,85.741 74.854,90.424 75.362,90.932 K1.3 ; v1(99.294,83.967) J1.8
  Bottom Layer w0.254: v1(76.073,85.217) 94.234,85.217 95.484,83.967 v1(99.294,83.967)
StartupP: B8.1 U2.11 | length 33.4
  Top Layer w0.254: v1(94.107,64.262) 94.107,69.066 94.256,69.215 U2.11 ; B8.1 112.776,58.039 113.665,57.15 v1(113.792,57.15)
  Bottom Layer w0.254: v1(94.107,64.262) 95.504,65.659 107.442,65.659 113.792,59.309 v1(113.792,57.15)
TPS: J1.2 U1.3 U1.5 | length 29.8
  Top Layer w0.254: v1(87.249,77.216) 87.884,76.581 U1.3 ; U1.5 v1(96.901,75.311)
  Bottom Layer w0.254: v1(87.249,77.216) 88.138,77.216 90.043,75.311 v1(96.901,75.311) 100.194,75.311 105.9,81.017 105.9,82.659 J1.2
TpsCheck: R3.1 R7.2 U1.6 | length 11.4
  Top Layer w0.254: R3.1 90.297,83.82 90.043,83.566 R7.2 90.678,82.538 90.932,82.284 90.932,80.133 93.345,77.72 93.345,76.73 93.494,76.581 U1.6
Vdd: B1.3 B2.4 B2.8 B3.4 B3.8 B4.5 B5.14 B6.5 B7.2 B7.5 B8.5 B9.5 B10.5 C7.2 C8.2 LS1.P R1.2 R2.2 R3.2 R4.1 R9.2 R13.1 U1.8 U2.13 U2.14 U3.8 X1.1 | length 260.5
  Top Layer w0.254: B3.4 76.505,72.898 74.549,74.854 74.549,79.648 77.216,82.315 R13.1 77.258,84.116 77.258,85.767 81.026,89.535 85.979,89.535 87.954,91.51 C8.2 ; U3.8 82.042,85.995 82.191,86.144 R2.2 ; R4.1 86.986,64.314 B3.8 ; B2.8 92.293,54.127 95.093,54.127 95.372,53.848 B10.5 95.467,52.967 96.02,52.967 97.663,54.61 97.663,54.971 98.384,55.691 98.384,59.698 98.235,59.847 B4.5 ; R3.2 86.995,86.868 86.487,86.36 R1.2 85.407,85.946 85.209,86.144 R2.2 ; C7.2 91.802,91.51 C8.2 ; v1(93.472,72.517) 93.605,72.517 94.113,73.025 U2.14 U2.13 ; U1.8 96.368,79.121 97.212,79.966 B1.3 ; v1(99.295,86.493) 97.212,84.411 B1.3 ; B6.5 104.14,52.6 104.289,52.451 111.125,52.451 111.379,52.705 X1.1 ; B8.5@110.861,58.786 110.82,58.745 110.82,58.369 109.59,57.139 109.59,53.986 v1(109.601,53.975) 111.326,53.975 X1.1 ; B8.5 109.877,58.801 109.728,58.95 109.728,61.827 109.877,61.976 B9.5 ; B7.5 111.846,74.991 110.896,74.041 B7.2 106.649,74.041 106.426,74.264 v1(106.426,75.819) 106.426,77.194 106.277,77.343 104.027,77.343 99.944,81.427 B1.3 ; R9.2 118.16,57.452 114.63,53.922 X1.1 ; R2.2 83.82,87.63 84.582,88.392 85.908,88.392 87.857,90.341 89.182,90.341 89.654,90.813 C8.2
  Bottom Layer w0.254: B3.8 87.597,64.958 82.075,59.436 B2.4 ; v1(99.295,86.493) 102.158,89.356 111.055,89.356 112.288,90.589 LS1.P ; v1(106.426,75.819) 105.41,74.803 102.235,74.803 99.949,72.517 v1(93.472,72.517) 89.68,72.517 88.353,73.844 82.158,73.844 81.212,72.898 B3.4 79.064,71.952 79.064,62.414 B2.4 ; v1(109.601,53.975) 92.141,53.975 B2.8 83.373,57.785 82.191,57.785 82.042,57.934 B2.4
pads on no net: B1.4 B6.1 B6.6 B6.7 B6.9 B6.10 B6.11 B6.12 B6.13 B6.14 B6.15 B6.16 B7.1 B9.1 B10.1 J1.4 J1.MH1 J1.MH2 J1.MH3 U2.8 U2.9 U2.10

## Polygon pours and split planes (outlines as drawn)
GND on Top Layer "NONET_L-01_P-001" (solid, remove dead copper, pour order 0): 123.19,49.403 123.19,97.282 73.914,97.282 73.914,49.403
GND on Bottom Layer "NONET_L-01_P-001" (solid, remove dead copper, pour order 2): 73.914,97.409 73.914,49.53 123.19,49.53 123.19,97.409

## Silkscreen, mask and mechanical layers (free items; w line width, h text height)
Bottom Overlay:
  drawing of 26 lines, arcs and shapes, not listed
Mechanical 1:
  the board outline again, w0.254

## Text inside footprints (layer, text, board x,y; h text height)
U2: Top Overlay "*" at 89.98,73.456 h1.27; Top 3D Body "*" at 91.084,72.238 h1.27